# Altium PCB Safety-Rev1.PcbDoc
Units mil, origin at the board's own origin, x right, y up, seen from the top; angles counter-clockwise.
Board outline 2880 x 3030 mil, 2 copper layers (Top Layer, Bottom Layer); 107 components, 47 nets, 333 pads, 87 vias.
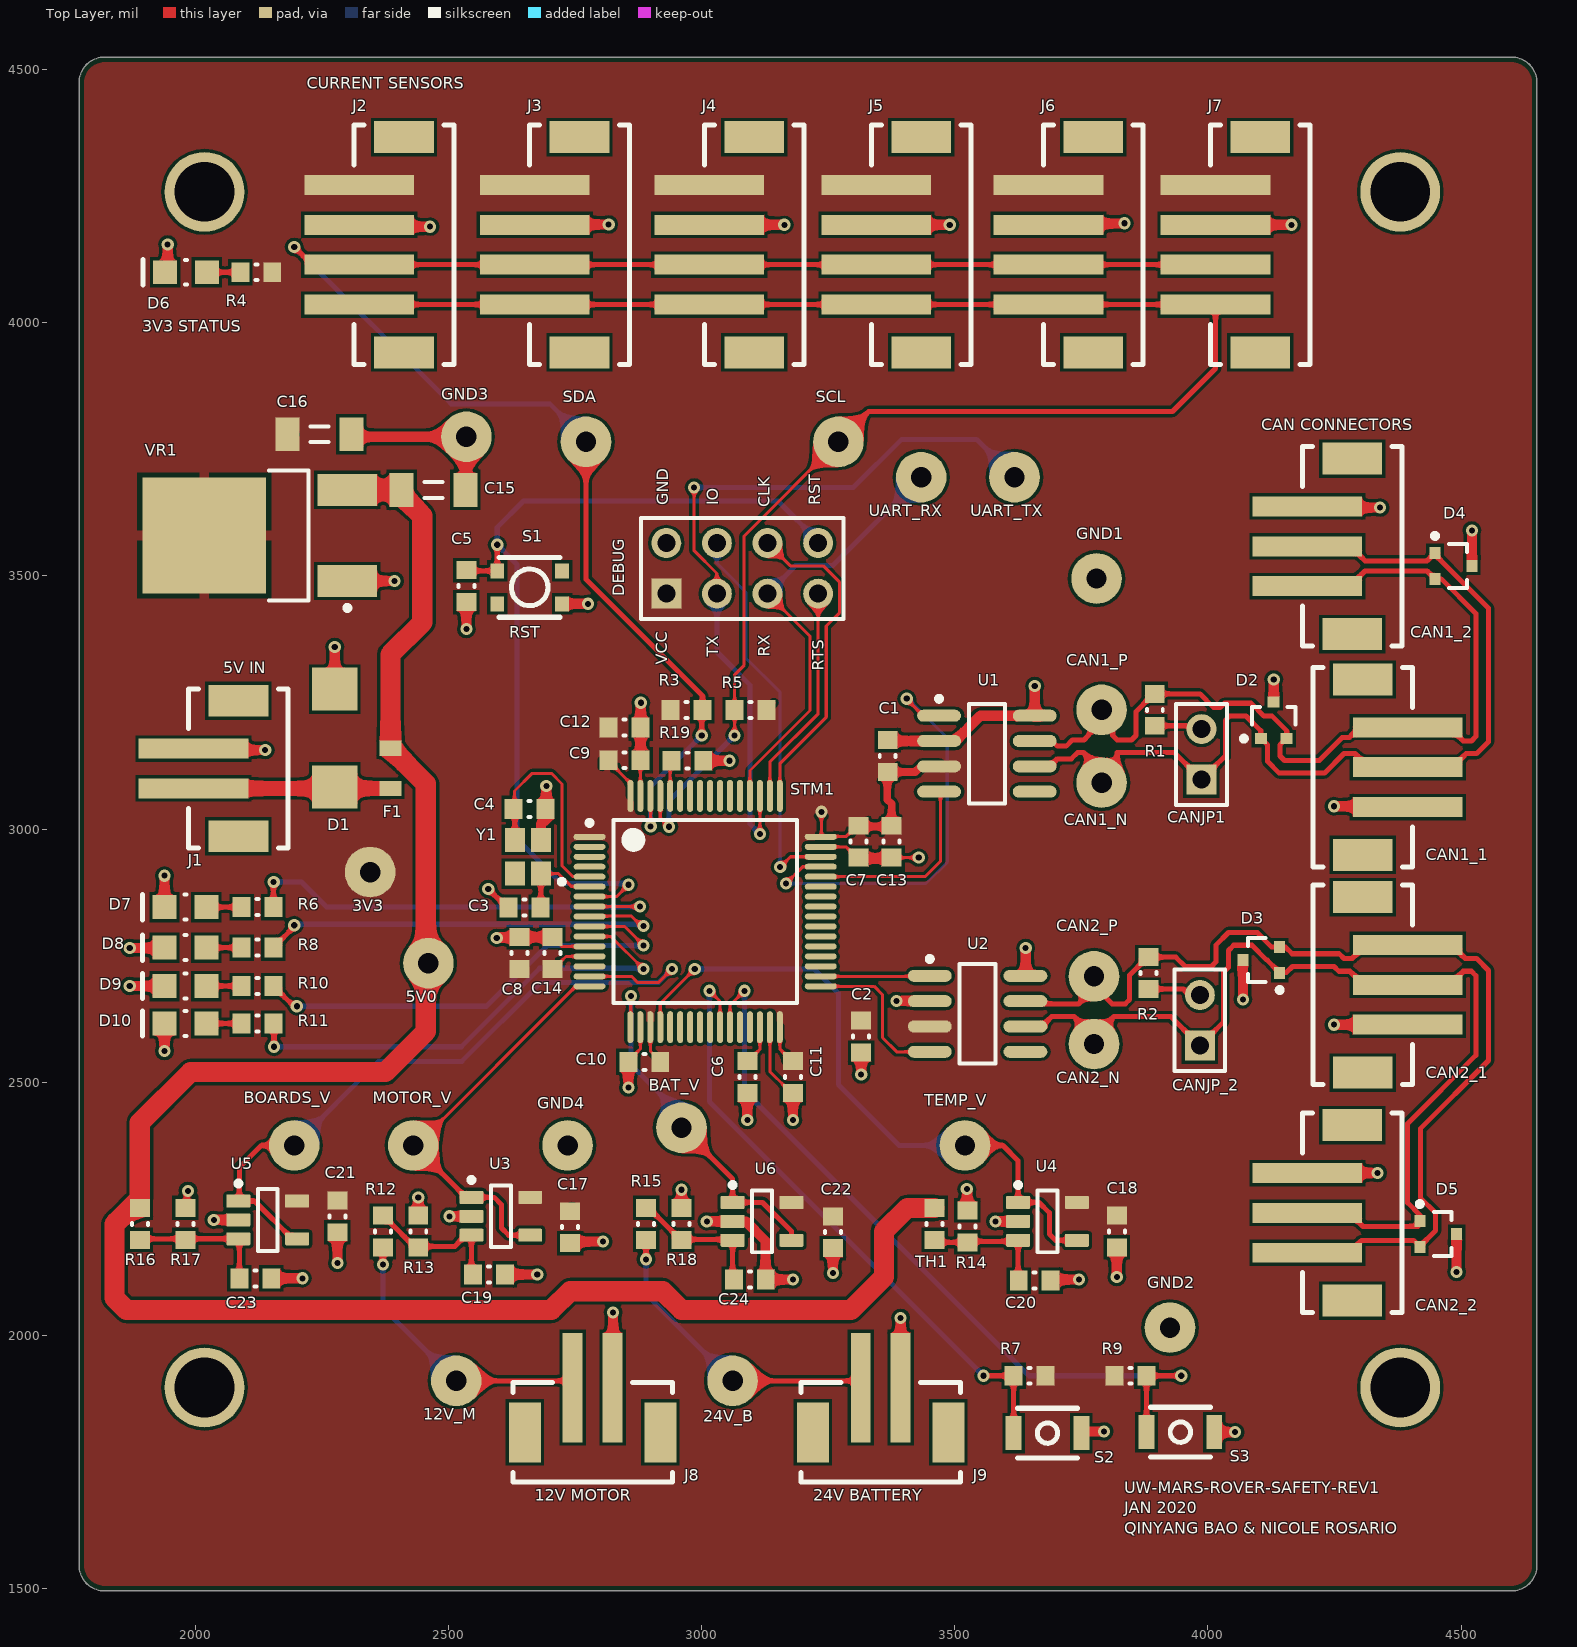
[diagram p0: Top Layer view]
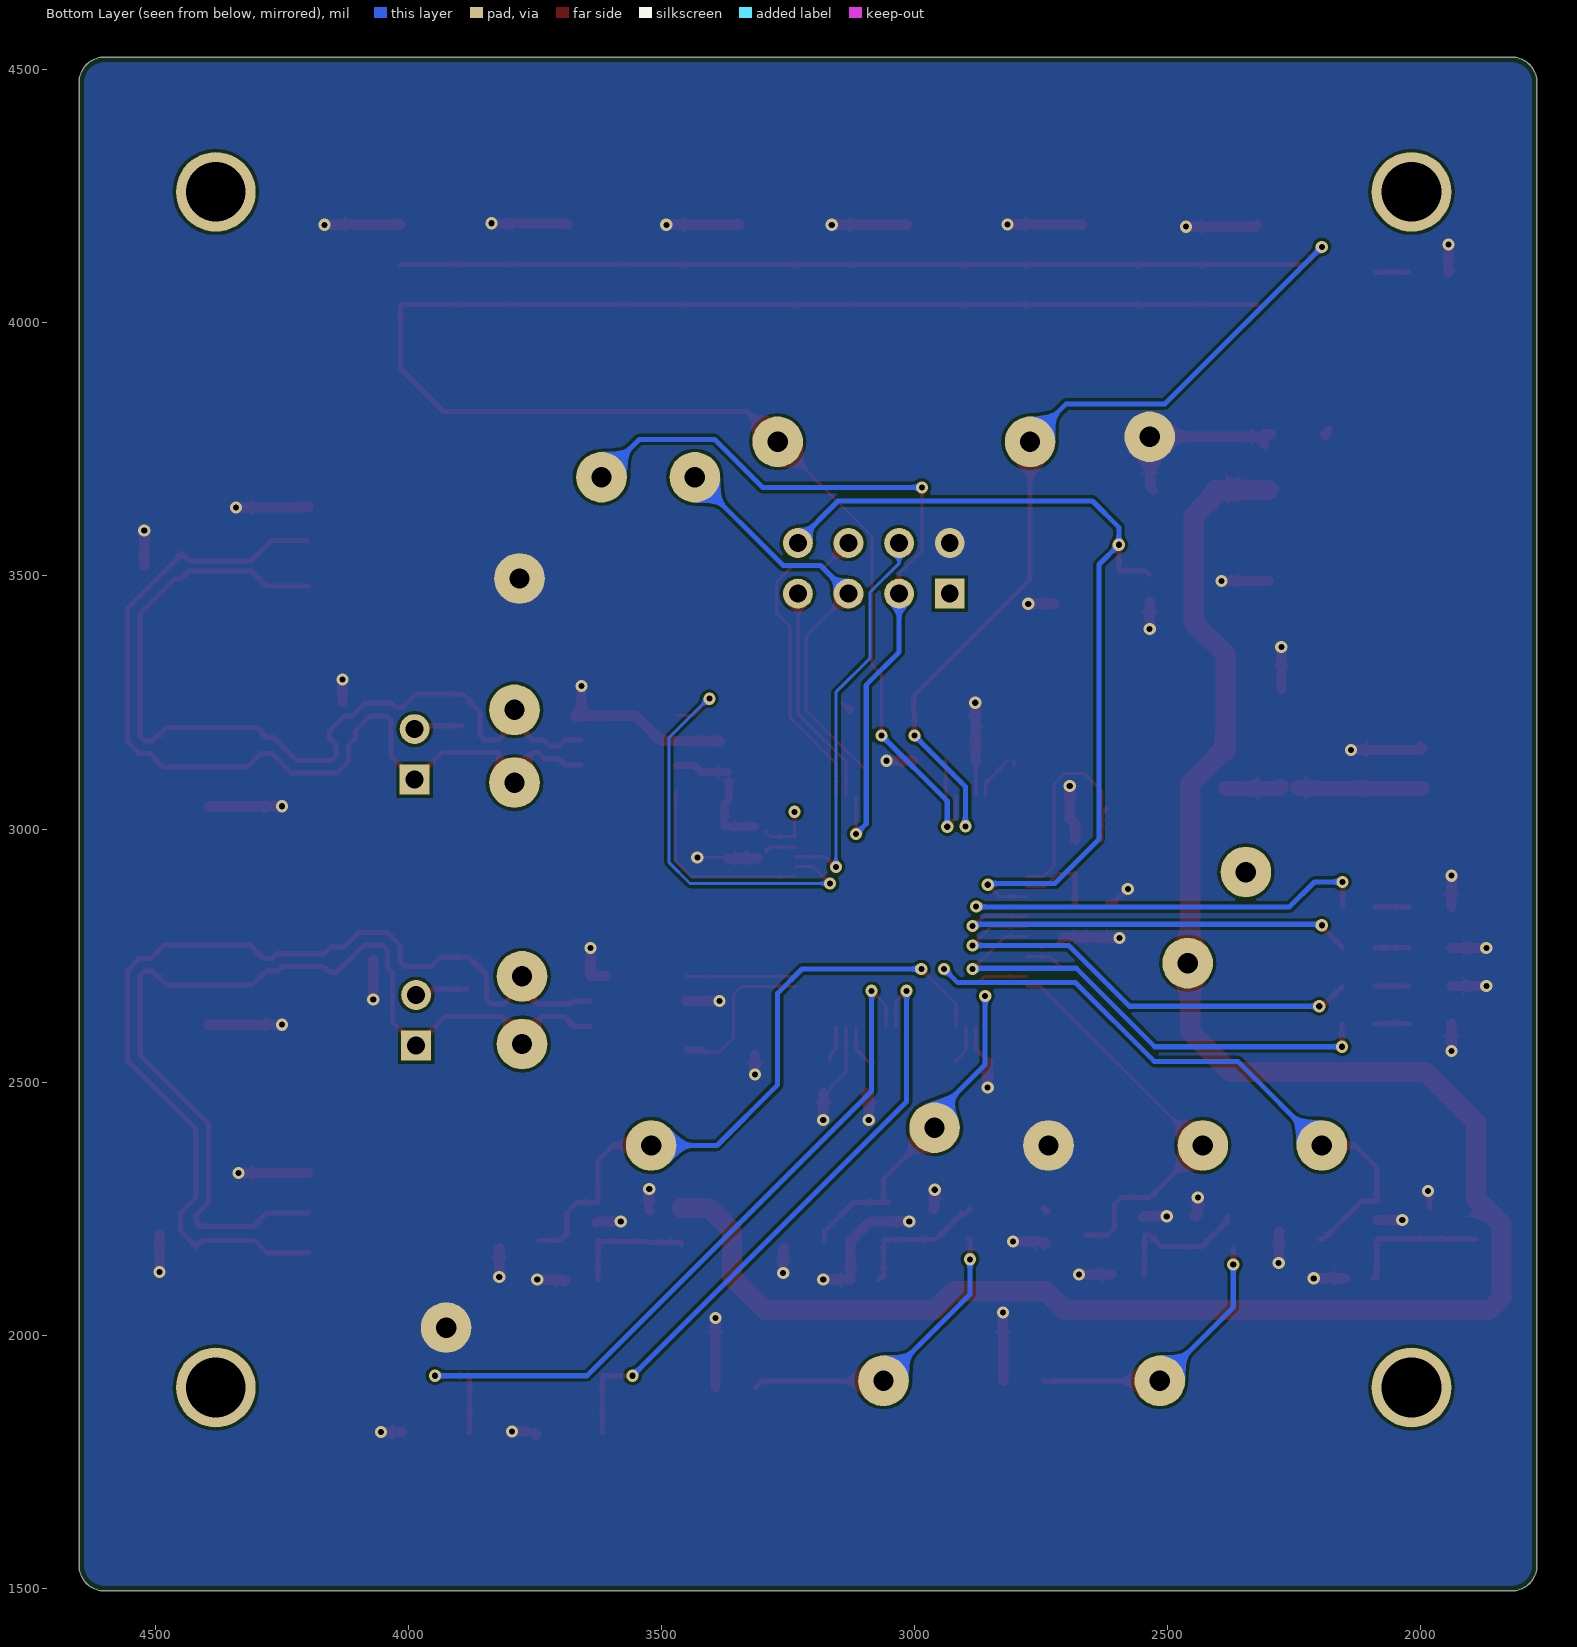
[diagram p1: Bottom Layer view, seen from below]

## Layer stack, top to bottom
Top Solder: solder mask 0.4, Solder Resist, Dk 3.5
Top Layer: signal copper 1.4
Dielectric 1: dielectric 12.6, FR-4, Dk 4.8
Bottom Layer: signal copper 1.4
Bottom Solder: solder mask 0.4, Solder Resist, Dk 3.5

## Board outline
1770,1545 1770,4475 cw(c1820,4475) 1820,4525 4600,4525 cw(c4600,4475) 4650,4475 4650,1545 cw(c4600,1545) 4600,1495 1820,1495 cw(c1820,1545)

## Design rules (kind name [scope] priority, off if disabled: settings)
BoardOutlineClearance [All] p1: gap=10 ignorepadtopadclearanceinfootprint=FALSE except(0: Arc-SplitContinuation Track-SplitContinuation SMDPad-SplitContinuation THPad-SplitContinuation Via-SplitContinuation Fill-SplitContinuation Poly-SplitContinuation Region-SplitContinuation Text-SplitContinuation)
Clearance [All] p1: gap=6 ignorepadtopadclearanceinfootprint=FALSE except(0: Arc-Hole Track-Hole SMDPad-Hole THPad-Hole Via-Hole Fill-Hole Poly-Hole Region-Hole Text-Hole)
DiffPairsRouting [All] p1: maxlimit=10 minlimit=10 mostfreqgap=10 toplayer_minwidth=6 toplayer_maxwidth=15 toplayer_prefwidth=10 bottomlayer_minwidth=6 bottomlayer_maxwidth=15 bottomlayer_prefwidth=10 maxuncoupledlength=500
HoleSize [All] p1: absolutevalues=TRUE maxlimit=120 minlimit=1 maxpercent=80.000 minpercent=20.000
MinimumSolderMaskSliver [All] p1: minsoldermaskwidth=5
PolygonConnect PolygonConnect_1 [InComponent('VR1') and InNet('+3V3')] p1: connectstyle=Relief reliefconductorwidth=20 reliefentries=4 polygonreliefangle="90 Angle" airgapwidth=10
PolygonConnect [All] p2: connectstyle=Direct reliefconductorwidth=10 reliefentries=4 polygonreliefangle="90 Angle" airgapwidth=10
RoutingVias [All] p1: holewidth=12 width=24 viastyle="Through Hole" minholewidth=12 minwidth=24 maxholewidth=28 maxwidth=50
SilkToSolderMaskClearance [IsPad] p1: minsilkscreentomaskgap=6 clearancetoexposedcopper=TRUE
SolderMaskExpansion [All] p1: expansion=4 istentingtop=FALSE
Width [All] p1: maxlimit=40 minlimit=6 preferedwidth=10 minimp=50.000000 maximp=50.000000 favimp=50.000000
26 further rules are at their usual default settings.

## Classes and differential pairs
component class Sense: BAT_V BOARDS_V C17 C18 C19 C20 C21 C22 C23 C24 GND4 MOTOR_V R12 R13 R14 R15 R16 R17 R18 TEMP_V TH1 U3 U4 U5 U6
component class Support: D7 D8 D9 D10 R6 R7 R8 R9 R10 R11 S2 S3 UART_RTS
component class Power: 3V3 3v3 5V0 C15 C16 D6 GND3 R4 VR1
component class MCU: C3 C4 C5 C6 C7 C8 C9 C10 C11 C12 C13 C14 R3 R5 R19 S1 SCL SDA STM1 UART_RX UART_TX Y1
component class Connectors: 12V_M 24V_B CAN1_1 CAN1_2 CAN2_1 CAN2_2 D1 D2 D3 D4 D5 DEBUG F1 J1 J2 J3 J4 J5 J6 J7 J8 J9
component class CAN: C1 C2 CAN1_N CAN1_P CAN2_N CAN2_P CANJP1 CANJP_2 GND1 GND2 R1 R2 U1 U2
differential pair CAN2: +CAN2_P -CAN2_N
differential pair CAN1: +CAN1_P -CAN1_N

## Components (designator, comment, footprint, x,y, rotation, side; value= is the part's Value field where it differs from the comment)
3V3 "TESTPOINT_LOOP" TESTPOINT_LOOP 2345,2915 r0 top
5V0 "TESTPOINT_LOOP" TESTPOINT_LOOP 2460,2735 r0 top
12V_M "TESTPOINT_LOOP" TESTPOINT_LOOP 2515,1910 r0 top
24V_B "TESTPOINT_LOOP" TESTPOINT_LOOP 3060.98,1910 r0 top
BAT_V "TESTPOINT_LOOP" TESTPOINT_LOOP 2960,2410 r0 top
BOARDS_V "TESTPOINT_LOOP" TESTPOINT_LOOP 2195,2375 r90 top
C1 "CAP_0.1uF_16V_0603" CAPC0603(1608)55_N 3367.43,3144.29 r270 top value=0.1uF
C2 "CAP_0.1uF_16V_0603" CAPC0603(1608)55_N 3315,2590 r90 top value=0.1uF
C3 "CAP_15pF_0603" CAPC0603(1608)55_N 2650,2845 r0 top value=15pF
C4 "CAP_15pF_0603" CAPC0603(1608)55_N 2660,3040 r180 top value=15pF
C5 "CAP_0.1uF_16V_0603" CAPC0603(1608)55_N 2535,3480 r90 top value=0.1uF
C6 "CAP_4.7uF_0603" CAPC0603(1608)55_N 3090,2510 r90 top value=4.7uF
C7 "CAP_0.1uF_16V_0603" CAPC0603(1608)55_N 3310,2975 r90 top value=0.1uF
C8 "CAP_1uF_16V_0603" CAPC0603(1608)55_N 2640,2755 r270 top value=1uF
C9 "CAP_0.1uF_16V_0603" CAPC0603(1608)55_N 2847.69,3135.91 r180 top value=0.1uF
C10 "CAP_0.1uF_16V_0603" CAPC0603(1608)55_N 2886.57,2540 r0 top value=0.1uF
C11 "CAP_0.1uF_16V_0603" CAPC0603(1608)55_N 3180,2510 r90 top value=0.1uF
C12 "CAP_4.7uF_0603" CAPC0603(1608)55_N 2847.69,3200.4 r180 top value=4.7uF
C13 "CAP_0.1uF_16V_0603" CAPC0603(1608)55_N 3375,2975 r90 top value=0.1uF
C14 "CAP_10nF_0603" CAPC0603(1608)55_N 2705,2755 r270 top value=10nF
C15 "10uF" CAPC1206(3216) 2470,3670 r0 top
C16 "10uF" CAPC1206(3216) 2245,3780 r0 top
C17 "CAP_0.1uF_16V_0603" CAPC0603(1608)55_N 2740,2213.5 r90 top value=0.1uF
C18 "CAP_0.1uF_16V_0603" CAPC0603(1608)55_N 3820,2205 r270 top value=0.1uF
C19 "CAP_0.1uF_16V_0603" CAPC0603(1608)55_N 2579.49,2120.12 r180 top value=0.1uF
C20 "CAP_0.1uF_16V_0603" CAPC0603(1608)55_N 3657.84,2108.15 r180 top value=0.1uF
C21 "CAP_0.1uF_16V_0603" CAPC0603(1608)55_N 2280.16,2234.92 r90 top value=0.1uF
C22 "CAP_0.1uF_16V_0603" CAPC0603(1608)55_N 3259.06,2203.5 r90 top value=0.1uF
C23 "CAP_0.1uF_16V_0603" CAPC0603(1608)55_N 2117.99,2112.48 r180 top value=0.1uF
C24 "CAP_0.1uF_16V_0603" CAPC0603(1608)55_N 3095,2110 r180 top value=0.1uF
CAN1_1 "CON_3M_SM4" JST-B3B-SM4-TB 4207.65,3122.24 r270 top
CAN1_2 "CON_3M_SM4" JST-B3B-SM4-TB 4383.53,3558.5 r90 top
CAN1_N "TESTPOINT_LOOP" TESTPOINT_LOOP 3790,3091.69 r0 top
CAN1_P "TESTPOINT_LOOP" TESTPOINT_LOOP 3790,3235.61 r0 top
CAN2_1 "CON_3M_SM4" JST-B3B-SM4-TB 4207.65,2692.24 r270 top
CAN2_2 "CON_3M_SM4" JST-B3B-SM4-TB 4383.53,2241.77 r90 top
CAN2_N "TESTPOINT_LOOP" TESTPOINT_LOOP 3775,2575.24 r0 top
CAN2_P "TESTPOINT_LOOP" TESTPOINT_LOOP 3775,2709.06 r0 top
CANJP1 "JUMPER_2" HDR1X2 3987.28,3097.53 r90 top (schematic designator CANJP_1)
CANJP_2 "JUMPER_2" HDR1X2 3984.21,2572.16 r90 top
D1 "TVS_DIODE_BIDIRECTIONAL" TVS_DIODE_BIDIRECTIONAL 2275,3180 r90 top
D2 "TVS_DIODE_CAN" NXP-SOT323-3 4130,3215 r90 top
D3 "TVS_DIODE_CAN" NXP-SOT323-3 4105.39,2741.16 r180 top
D4 "TVS_DIODE_CAN" NXP-SOT323-3 4485,3520 r0 top
D5 "TVS_DIODE_CAN" NXP-SOT323-3 4455,2200 r0 top
D6 "DIO_LED_G" LED_0805_LINE 1981.12,4100 r180 top
D7 "DIO_LED_Y" LED_0805_LINE 1980,2845.87 r180 top
D8 "DIO_LED_G" LED_0805_LINE 1980,2765.87 r180 top
D9 "DIO_LED_G" LED_0805_LINE 1980,2689.92 r180 top
D10 "DIO_LED_G" LED_0805_LINE 1980,2615.87 r180 top
DEBUG "HEADER 4X2" HEADER_2X4 2930,3465 r0 top
F1 "FUSE_2A_0603" FUSE_0603 2385,3120 r90 top
GND1 "TESTPOINT_LOOP" TESTPOINT_LOOP 3780,3495 r0 top
GND2 "TESTPOINT_LOOP" TESTPOINT_LOOP 3925,2015 r0 top
GND3 "TESTPOINT_LOOP" TESTPOINT_LOOP 2535,3775 r0 top
GND4 "TESTPOINT_LOOP" TESTPOINT_LOOP 2735,2375 r0 top
J1 "CON_2M_SM4" JST-B2B-SM4-TB 2183.06,3119.64 r90 top
J2 "CON_4M_SM4" JST-B4B-SM4-TB 2510.27,4154.37 r90 top
J3 "CON_4M_SM4" JST-B4B-SM4-TB 2857.01,4154.37 r90 top
J4 "CON_4M_SM4" JST-B4B-SM4-TB 3202.01,4154.37 r90 top
J5 "CON_4M_SM4" JST-B4B-SM4-TB 3532.01,4154.37 r90 top
J6 "CON_4M_SM4" JST-B4B-SM4-TB 3872.01,4154.37 r90 top
J7 "CON_4M_SM4" JST-B4B-SM4-TB 4202.01,4154.37 r90 top
J8 "CON_2M_SM4" JST-B2B-SM4-TB 2784.37,1709.64 r0 top
J9 "CON_2M_SM4" JST-B2B-SM4-TB 3353.57,1709.64 r0 top
MOTOR_V "TESTPOINT_LOOP" TESTPOINT_LOOP 2430,2375 r90 top
R1 "RES_120R_0603" RESC0603(1608)_N 3895,3235.61 r270 top value=120R
R2 "RES_120R_0603" RESC0603(1608)_N 3882.6,2715.51 r270 top value=120R
R3 "RES_4K7_0603" RESC0603(1608)_N 2970,3235 r180 top value=4K7
R4 "RES_100R_0603" RESC0603(1608)_N 2120,4100 r0 top value=100R
R5 "RES_4K7_0603" RESC0603(1608)_N 3096.5,3235 r0 top value=4K7
R6 "RES_100R_0603" RESC0603(1608)_N 2122.35,2845.87 r180 top value=100R
R7 "RES_10K_0603" RESC0603(1608)_N 3647.64,1920 r180 top value=10K
R8 "RES_100R_0603" RESC0603(1608)_N 2122.35,2765.87 r180 top value=100R
R9 "RES_10K_0603" RESC0603(1608)_N 3847.16,1920 r180 top value=10K
R10 "RES_100R_0603" RESC0603(1608)_N 2122.35,2689.92 r180 top value=100R
R11 "RES_100R_0603" RESC0603(1608)_N 2122.35,2615.87 r180 top value=100R
R12 "RES_1K_0603" RESC0603(1608)_N 2370,2205 r90 top value=1K
R13 "RES_1K_0603" RESC0603(1608)_N 2440,2205 r90 top value=1K
R14 "RES_1K_0603" RESC0603(1608)_N 3525,2215 r90 top value=1K
R15 "RES_1K_0603" RESC0603(1608)_N 2890,2220 r90 top value=1K
R16 "RES_1K_0603" RESC0603(1608)_N 1890,2220 r270 top value=1K
R17 "RES_1K_0603" RESC0603(1608)_N 1980,2220 r90 top value=1K
R18 "RES_1K_0603" RESC0603(1608)_N 2960,2220 r90 top value=1K
R19 "RES_10K_0603" RESC0603(1608)_N 2971.5,3135 r180 top value=10K
S1 "SW_PWR" PTS830GM140 2660,3477.52 r180 top
S2 "SW_TACTILE" B3U-1100P 3683.07,1806.61 r0 top
S3 "SW_TACTILE" B3U-1100P 3945.59,1808.53 r0 top
SCL "TESTPOINT_LOOP" TESTPOINT_LOOP 3270,3765 r0 top
SDA "TESTPOINT_LOOP" TESTPOINT_LOOP 2771.37,3765 r0 top
STM1 "STM32F446RET6" STM-LQFP64_L 3006.65,2837.01 r0 top
TEMP_V "TESTPOINT_LOOP" TESTPOINT_LOOP 3520,2375 r90 top (schematic designator ONBOARD_TEMP_V)
TH1 "NTC_THERM_100K" RESC0603(1608)_N 3460,2220 r270 top value=100K
U1 "IC TXRX CAN" LT-S8_N 3563.35,3148.91 r0 top
U2 "IC TXRX CAN" LT-S8_N 3545,2635 r0 top
U3 "OPA313IDBVR" DBV0005A_M 2603.07,2235 r0 top
U4 "OPA313IDBVR" DBV0005A_M 3683.07,2225 r0 top
U5 "OPA313IDBVR" DBV0005A_M 2142.6,2227.87 r0 top
U6 "OPA313IDBVR" DBV0005A_M 3119.06,2225 r0 top
UART_RX "TESTPOINT_LOOP" TESTPOINT_LOOP 3433.58,3695.06 r0 top
UART_TX "TESTPOINT_LOOP" TESTPOINT_LOOP 3617.95,3695.06 r0 top
VR1 "5V0_3V3_LDO" VOLTAGE_REGULATOR 2190,3580 r90 top
Y1 "CRYSTAL_32MHZ" AVX-CX2520DB32000D0GEJZ1-4_V 2656.55,2945.28 r180 top
? "Comment" MOUNTING_HOLE#1 4297.96,1833.65 r0 top
? "Comment" MOUNTING_HOLE#2 2037.76,2033.65 r0 top
? "Comment" MOUNTING_HOLE#3 4615.96,3903.86 r0 top
? "Comment" MOUNTING_HOLE#4 1767.76,3838.86 r0 top

## Footprints (in the part's own frame and the unit in brackets; to place one, negate y for a bottom-side part, rotate by r counter-clockwise, add the part's x,y. Pads: shape width x height; smd on the part's side, far side on the other; paste and mask are expansions set on the pad)
AVX-CX2520DB32000D0GEJZ1-4_V [mm] "Hand Drawn, 4-Leads,Body 2.5x2mm"
  rect 1x1.2 smd: 1(-0.65,0.85) 2(-0.65,-0.85) 3(0.65,-0.85) 4(0.65,0.85)
  silkscreen extent -1.83,1.13 -1.58,1.38, body extent -1,-1.25 1,1.25, height 0.55
B3U-1100P [mm] "TACTILE SWITCH GREY"
  rect 0.8x1.7 smd: 1(-1.7,0) 2(1.7,0)
  silkscreen extent -1.5,-1.25 1.5,1.25, body extent -2,-1.25 2,1.25, height 1.6
CAPC0603(1608)55_N [mm] "Chip Capacitor, Body 1.6x0.8mm, Height 0.55mm, IPC Medium Density"
  rect 0.9x1 smd: 1(-0.8,0) 2(0.8,0)
  silkscreen extent -0.05,-0.4 0.05,0.4, body extent -0.87,-0.48 0.88,0.47, height 0.55
CAPC1206(3216) [mm] "Chip Capacitor, Body 3.2x1.6mm, Height 0.55mm, IPC Medium Density"
  rect 1.2x1.7 smd: 1(-1.6,0) 2(1.6,0)
  silkscreen extent -0.45,-0.4 0.45,0.4, body extent -1.6,-0.85 1.6,0.85, height 1.75
DBV0005A_M [mm] "SOT23, 5-Leads, Body 3.05x1.75mm, Pitch 0.95mm, IPC Low Density"
  rrect15% 1.2x0.65 smd: 1(-1.475,0.95) 2(-1.475,0) 3(-1.475,-0.95) 4(1.475,-0.95) 5(1.475,0.95)
  silkscreen extent -1.6,-1.55 0.5,1.95, body extent -1.42,-1.46 1.42,1.46, height 1.08
FUSE_0603 [mm] "Chip Fuse, Body 1.6x0.81mm"
  rect 0.762x1.09 smd: 1(-1.005,0) 2(1.005,0)
  body extent -0.8,-0.38 0.8,0.38, height 0.75
HDR1X2 [mm] "Connector; Header; 2 Position"
  rect 1.5x1.5 hole 0.9: 1(0,0)
  round 1.5 hole 0.9: 2(2.54,0)
  silkscreen extent -1.27,-1.27 3.81,1.27, body extent -1.27,-1.27 3.81,1.27, height 6.35
HEADER_2X4 [mm]
  rect 1.5x1.5 hole 0.9: 1(0,0)
  round 1.5 hole 0.9: 2(2.54,0) 3(5.08,0) 4(7.62,0) 5(0,2.54) 6(2.54,2.54) 7(5.08,2.54) 8(7.62,2.54)
  silkscreen extent -1.27,-1.27 8.89,3.81, body extent -1.36,-1.32 8.8,3.67, height 8.54
JST-B2B-SM4-TB [mm]
  rect 1x5.5 smd: 1(-1,4.75) 2(1,4.75)
  rect 1.6x3 smd: 3(-3.4,2.5) 4(3.4,2.5)
  silkscreen extent -4,0 4,5, body extent -3.97,0 3.97,7, height 6.6
JST-B3B-SM4-TB [mm]
  rect 1x5.5 smd: 1(-2,4.75) 2(0,4.75) 3(2,4.75)
  rect 1.6x3 smd: 4(-4.4,2.5) 5(4.4,2.5)
  silkscreen extent -5,0 5,5, body extent -4.97,0 4.97,7, height 6.6
JST-B4B-SM4-TB [mm]
  rect 1x5.5 smd: 1(-3,4.75) 2(-1,4.75) 3(1,4.75) 4(3,4.75)
  rect 1.6x3 smd: 5(-5.4,2.5) 6(5.4,2.5)
  silkscreen extent -6,0 6,5, body extent -5.98,0 5.98,7, height 6.6
LED_0805_LINE [mm] "SMD, 2-Leads, Body 2x1.25mm"
  rect 1.2x1.2 smd: 1(-1.05,0) 2(1.05,0)
  silkscreen extent -0.05,-0.63 2.16,0.64, body extent -1,-0.63 1,0.63, height 0.8
LT-S8_N [mm] "SOP, 8-Leads, Body 4.9x3.9mm, Pitch 1.27mm, IPC Medium Density"
  oval 2.2x0.6 smd: 1(-2.4,1.905) 2(-2.4,0.635) 3(-2.4,-0.635) 4(-2.4,-1.905) 5(2.4,-1.905) 6(2.4,-0.635) 7(2.4,0.635) 8(2.4,1.905)
  silkscreen extent -2.52,-2.5 0.9,2.88, body extent -2,-2.5 2,2.5, height 1.76
MOUNTING_HOLE#1 [mm]
  round 4 hole 3 unplated: 0(2.083,1.6)
MOUNTING_HOLE#2 [mm]
  round 4 hole 3 unplated: 0(-0.508,-3.48)
MOUNTING_HOLE#3 [mm]
  round 4 hole 3 unplated: 0(-5.994,9.017)
MOUNTING_HOLE#4 [mm]
  round 4 hole 3 unplated: 0(6.35,10.668)
NXP-SOT323-3 [mm] "SOT23, 3-Leads, Body 2.2x1.35mm, Pitch 0.65mm"
  rect 0.55x0.6 smd paste-1: 1(-0.925,0.65) 2(-0.925,-0.65) 3(0.925,0)
  silkscreen extent -1.05,-1.1 0.67,1.62, body extent -1.15,-1.1 1.15,1.1, height 1.1
PTS830GM140 [mm] "PWR TACTILE SWITCH (RED)"
  rect 0.7x0.75 smd: 1(-1.625,0.825) 2(1.625,0.825) 3(-1.625,-0.825) 4(1.625,-0.825)
  silkscreen extent -1.53,-1.5 1.53,1.5, body extent -1.75,-1.3 1.75,1.3, height 1.35
RESC0603(1608)_N [mm] "Chip Resistor, Body 1.6x0.8mm, IPC Medium Density"
  rect 0.9x1 smd: 1(-0.8,0) 2(0.8,0)
  silkscreen extent -0.05,-0.4 0.05,0.4, body extent -0.85,-0.47 0.85,0.47, height 0.6
STM-LQFP64_L [mm] "QFP, 64-Leads, Body 10x10mm, Pitch 0.5mm, IPC High Density"
  oval 1.6x0.3 smd: 1(-5.8,3.75) 2(-5.8,3.25) 3(-5.8,2.75) 4(-5.8,2.25) 5(-5.8,1.75) 6(-5.8,1.25) 7(-5.8,0.75) 8(-5.8,0.25) 9(-5.8,-0.25) 10(-5.8,-0.75) 11(-5.8,-1.25) 12(-5.8,-1.75) 13(-5.8,-2.25) 14(-5.8,-2.75) 15(-5.8,-3.25) 16(-5.8,-3.75) 33(5.8,-3.75) 34(5.8,-3.25) 35(5.8,-2.75) 36(5.8,-2.25) 37(5.8,-1.75) 38(5.8,-1.25) 39(5.8,-0.75) 40(5.8,-0.25) 41(5.8,0.25) 42(5.8,0.75) 43(5.8,1.25) 44(5.8,1.75) 45(5.8,2.25) 46(5.8,2.75) 47(5.8,3.25) 48(5.8,3.75)
  oval 0.3x1.6 smd: 17(-3.75,-5.8) 18(-3.25,-5.8) 19(-2.75,-5.8) 20(-2.25,-5.8) 21(-1.75,-5.8) 22(-1.25,-5.8) 23(-0.75,-5.8) 24(-0.25,-5.8) 25(0.25,-5.8) 26(0.75,-5.8) 27(1.25,-5.8) 28(1.75,-5.8) 29(2.25,-5.8) 30(2.75,-5.8) 31(3.25,-5.8) 32(3.75,-5.8) 49(3.75,5.8) 50(3.25,5.8) 51(2.75,5.8) 52(2.25,5.8) 53(1.75,5.8) 54(1.25,5.8) 55(0.75,5.8) 56(0.25,5.8) 57(-0.25,5.8) 58(-0.75,5.8) 59(-1.25,5.8) 60(-1.75,5.8) 61(-2.25,5.8) 62(-2.75,5.8) 63(-3.25,5.8) 64(-3.75,5.8)
  silkscreen extent -5.92,-4.6 4.6,4.6, body extent -5,-5 5,5, height 1.6
TESTPOINT_LOOP [mm]
  round 2.54 hole 1.02: 1(0,0)
  body extent -1.27,-1.27 1.27,1.27, height 4.57
TVS_DIODE_BIDIRECTIONAL [mm]
  rect 2.16x2.26 smd: 1(-2.45,0) 2(2.45,0)
  body extent -2.7,-1.8 2.7,1.8, height 2.27
VOLTAGE_REGULATOR [mm] "DPAK, 3-Leads, Body 6.095x6.54mm, Pitch 4.57mm"
  rect 1.6x3 smd: 1(-2.285,-2.79) 3(2.285,-2.79)
  rect 5.8x6.2 smd: 2(0,4.39)
  silkscreen extent -3.76,-2.92 3.27,1.14, body extent -3.27,-0.84 3.27,5.25, height 2.38

## Part data
3V3 5V0 12V_M 24V_B BAT_V BOARDS_V CAN1_N CAN1_P CAN2_N CAN2_P GND1 GND2 GND3 GND4 MOTOR_V SCL SDA TEMP_V UART_RX UART_TX: "Loop testpoint through-hole pad", Manufacturer="Keystone Electronics", Manufacturer Part Number 1=5002, Supplier Part Number 1=36-5002-ND, Supplier 1=Digi-Key
C1 C2 C5 C7 C9 C10 C11 C13 C17 C18 C19 C20 C21 C22 C23 C24: "CAP CER 0.1UF 16V X7R 0603", Manufacturer=Yageo, MPN=CC0603KRX7R7BB104, Package="0603 (1608 Metric)", Supplier Part Number 1=311-1088-1-ND, Temperature Coefficient=X7R, Voltage Rating=16V, Dimensions="0.063\" L x 0.031\" W (1.60mm x 0.80mm)", Supplier 1=Digi-Key
C3 C4: "CAP CER 15PF 250V NPO 0603", Manufacturer=Yageo, MPN=AC0603JRNPOYBN150, Package="0603 (1608 Metric)", Supplier Part Number 1=311-3282-1-ND, Temperature Coefficient=NP0, Voltage Rating=250V, Dimensions="0.063\" L x 0.031\" W (1.60mm x 0.80mm)", Supplier 1=Digi-Key
C6 C12: "CAP CER 4.7UF 6.3V X5R 0603", Manufacturer=Yageo, MPN=CC0603KRX5R5BB475, Package="0603 (1608 Metric)", Supplier Part Number 1=311-1521-1-ND, Temperature Coefficient=X5R, Voltage Rating=6.3V, Dimensions="0.063\" L x 0.031\" W (1.60mm x 0.80mm)", Supplier 1=Digi-Key
C8: "CAP CER 1UF 16V Y5V 0603", Manufacturer=Yageo, MPN=CC0603ZRY5V7BB105, Package="0603 (1608 Metric)", Supplier Part Number 1=311-1372-1-ND, Temperature Coefficient=Y5V, Voltage Rating=16V, Dimensions="0.063\" L x 0.031\" W (1.60mm x 0.80mm)", Supplier 1=Digi-Key
C14: "CAP CER 10000PF 16V X7R 0603", Manufacturer=Yageo, MPN=CC0603KRX7R7BB103, Package="0603 (1608 Metric)", Supplier Part Number 1=311-3369-1-ND, Temperature Coefficient=X7R, Voltage Rating=16V, Dimensions="0.063\" L x 0.031\" W (1.60mm x 0.80mm)", Supplier 1=Digi-Key
C15 C16: library part CAP_10uF_50V_1206, "CAP CER 10UF 50V X5R 1206", Manufacturer=Murata, MPN=GRT31CR61H106KE01L, Package="1206 (3216 Metric)", Supplier Part Number 1=490-12456-1-ND, Voltage Rating=50V, Dimensions="0.126\" L x 0.063\" W (3.20mm x 1.6mm)", Supplier 1=Digi-Key
CAN1_1 CAN1_2 CAN2_1 CAN2_2: Manufacturer=JST, Manufacturer Part Number=B3B-PH-SM4-TB(LF)(SN), Max Current Rating=2A, Max Voltage Rating=100V, Supplier Part Number 1=455-1735-1-ND, ComponentLink1Description=https://datasheet.ciiva.com/11747/0900766b80ddea81-11747684.pdf?src-supplier=RSComponents, ComponentLink1URL=https://datasheet.ciiva.com/11747/0900766b80ddea81-11747684.pdf?src-supplier=RSComponents, Pitch=2mm, Supplier 1=Digi-Key
CANJP1 CANJP_2: "HEADER 2X1", Supplier Part Number 1=A26542-ND, Supplier 1=Digi-Key
D1: "TVS DIODE 5V 9.2V DO214AA", Breakdown Voltage=6.4V, Case/Package=SMB, Clamping Voltage=9.2V, Leakage Current=1.6mA, Manufacturer="Nexperia USA Inc.", Manufacturer 1=Littelfuse, Manufacturer Part Number 1=SMBJ5.0CA, Max Breakdown Voltage=7V, Max Operating Temperature=150°C, Max Power Dissipation=5W, Max Surge Current=65.3A, Min Operating Temperature=-65°C, MPN=PESD2CAN,215, Operating Supply Voltage=5V, Package="SC-70, SOT-323", Package Quantity=3000, Peak Pulse Power=600W, Power Line Protection=No, Supplier Part Number 1=1727-3891-1-ND, Test Current=10mA, ComponentLink1Description=Datasheet, ComponentLink1URL=https://www.littelfuse.com/~/media/electronics/datasheets/tvs_diodes/littelfuse_tvs_diode_smbj_datasheet.pdf.pdf, Composition=Zener, Direction=Bidirectional, Element Configuration=Single, ESD Protection=Yes, Height=0.096inch, Lead Free="Lead Free", Length=0.179inch, Max Reverse Leakage Current=1.6mA, Min Breakdown Voltage=6.4V, Mount="Surface Mount", Number of Bidirectional Channels=1, Number of Channels=1, Number of Elements=1, Number of Pins=2, Packaging="Tape and Reel", Peak Pulse Current=65.3A, Polarity=Bidirectional, Power Dissipation=600W, Pricing 1="1=0.39000, 10=0.31300, 25=0.28640, 100=0.17980, 250=0.17784, 500=0.16650, 1000=0.11322 (USD)", Radiation Hardening=No, REACH SVHC="No SVHC", Reverse Breakdown Voltage=6.4V, Reverse Standoff Voltage=5V, Stock 1=23233, Supplier 1=Digi-Key, Termination=SMD/SMT, Voltage Rating (DC)=5V, Width=0.155inch
D2 D3 D4 D5: "TVS DIODE 24V 41V SOT323-3", Manufacturer="Nexperia USA Inc.", Manufacturer Part Number=PESD2CAN,215, Package="SC-70, SOT-323", Supplier Part Number 1=1727-3891-1-ND, ComponentLink1Description=Datasheet, ComponentLink1URL=https://assets.nexperia.com/documents/data-sheet/PESD1CAN-U.pdf, Supplier 1=Digi-Key
D6 D8 D9 D10: "LED GREEN DIFFUSED 0805 SMD", Forward Voltage Drop=2.2V, Manufacturer=OSRAM, MPN="LG R971-KN-1", Package="0805 (2012 Metric)", Supplier Part Number 1=475-1410-1-ND, Supplier 1=Digi-Key
D7: "LED YELLOW DIFFUSED 0805 SMD", Forward Voltage Drop=2.2V, Manufacturer=OSRAM, MPN="LY R976-PS-36", Package="0805 (2012 Metric)", Supplier Part Number 1=475-2560-1-ND, Supplier 1=Digi-Key
DEBUG: "Header, 4-Pin Dual row", Manufacturer="Sullins Connector Solutions", MPN=GRPB042VWVN-RC, Supplier Part Number 1=S9015E-04-ND, Supplier 1=Digi-Key
F1: "FUSE SMD 2A 32V", Current Rating=2A, Supplier Part Number 1=F7132CT-ND, Voltage Rating (AC)=32V, ComponentLink1Description=https://datasheet.ciiva.com/303/467-303400.pdf?src-supplier=Digi-Key, ComponentLink1URL=https://datasheet.ciiva.com/303/467-303400.pdf?src-supplier=Digi-Key, ComponentLink2Description=http://datasheet.octopart.com/0467002.NRHF-Littelfuse-datasheet-32023482.pdf?src-supplier=Future+Electronics, ComponentLink2URL=http://datasheet.octopart.com/0467002.NRHF-Littelfuse-datasheet-32023482.pdf?src-supplier=Future+Electronics, ComponentLink3Description=http://datasheet.octopart.com/0467002.NRHF-Littelfuse-datasheet-136509808.pdf?src-supplier=Future+Electronics, ComponentLink3URL=http://datasheet.octopart.com/0467002.NRHF-Littelfuse-datasheet-136509808.pdf?src-supplier=Future+Electronics, Mount="Surface Mount", Supplier 1=Digi-Key, Supplier Packaging 1="Cut Tape", Voltage Rating (DC)=32V
J1 J8 J9: Manufacturer=JST, Manufacturer Part Number=B2B-PH-SM4-TB(LF)(SN), Max Current Rating=2A, Max Voltage Rating=100V, Supplier Part Number 1=455-1734-1-ND, ComponentLink1Description=https://datasheet.ciiva.com/11748/0900766b80ddea81-11748001.pdf?src-supplier=RSComponents, ComponentLink1URL=https://datasheet.ciiva.com/11748/0900766b80ddea81-11748001.pdf?src-supplier=RSComponents, ComponentLink2Description=https://datasheet.ciiva.com/16216/b2b-ph-sm4-tblfsn-16216102.pdf?src-supplier=Future+Electronics, ComponentLink2URL=https://datasheet.ciiva.com/16216/b2b-ph-sm4-tblfsn-16216102.pdf?src-supplier=Future+Electronics, ComponentLink3Description=https://datasheet.ciiva.com/8052/80567-8052023.pdf?src-supplier=Element14, ComponentLink3URL=https://datasheet.ciiva.com/8052/80567-8052023.pdf?src-supplier=Element14, ComponentLink4Description=https://datasheet.ciiva.com/712/eph-712504.pdf?src-supplier=Digi-Key, ComponentLink4URL=https://datasheet.ciiva.com/712/eph-712504.pdf?src-supplier=Digi-Key, ComponentLink5Description=https://datasheet.ciiva.com/712/eph-712505.pdf?src-supplier=Digi-Key, ComponentLink5URL=https://datasheet.ciiva.com/712/eph-712505.pdf?src-supplier=Digi-Key, ComponentLink6Description=https://datasheet.ciiva.com/712/eph-712506.pdf?src-supplier=Digi-Key, ComponentLink6URL=https://datasheet.ciiva.com/712/eph-712506.pdf?src-supplier=Digi-Key, Pitch=2mm, Supplier 1=Digi-Key
J2 J3 J4 J5 J6 J7: Manufacturer=JST, Manufacturer Part Number=B4B-PH-SM4-TB(LF)(SN), Max Current Rating=2A, Max Voltage Rating=100V, Supplier Part Number 1=455-1736-1-ND, ComponentLink1Description=https://datasheet.ciiva.com/8052/1699381-8052048.pdf?src-supplier=Element14, ComponentLink1URL=https://datasheet.ciiva.com/8052/1699381-8052048.pdf?src-supplier=Element14, ComponentLink2Description=https://datasheet.ciiva.com/11747/0900766b80ddea81-11747504.pdf?src-supplier=RSComponents, ComponentLink2URL=https://datasheet.ciiva.com/11747/0900766b80ddea81-11747504.pdf?src-supplier=RSComponents, ComponentLink3Description=https://datasheet.ciiva.com/6747/80567-6747409.pdf?src-supplier=Newark, ComponentLink3URL=https://datasheet.ciiva.com/6747/80567-6747409.pdf?src-supplier=Newark, ComponentLink4Description=https://datasheet.ciiva.com/727/eph-727525.pdf?src-supplier=Digi-Key, ComponentLink4URL=https://datasheet.ciiva.com/727/eph-727525.pdf?src-supplier=Digi-Key, ComponentLink5Description=https://datasheet.ciiva.com/712/eph-712582.pdf?src-supplier=Digi-Key, ComponentLink5URL=https://datasheet.ciiva.com/712/eph-712582.pdf?src-supplier=Digi-Key, ComponentLink6Description=https://datasheet.ciiva.com/712/eph-712583.pdf?src-supplier=Digi-Key, ComponentLink6URL=https://datasheet.ciiva.com/712/eph-712583.pdf?src-supplier=Digi-Key, Pitch=2mm, Supplier 1=Digi-Key
R1 R2: "RES SMD 120 OHM 5% 1/10W 0603", Manufacturer=Yageo, MPN=RC0603JR-07120RL, Package="0603 (1608 Metric)", Supplier Part Number 1=311-120GRCT-ND, Tolerance=5%, Dimensions="0.063\" L x 0.031\" W (1.60mm x 0.80mm)", Supplier 1=Digi-Key
R3 R5: "RES SMD 4.7K OHM 5% 1/10W 0603", Manufacturer=Yageo, MPN=RC0603JR-074K7L, Package="0603 (1608 Metric)", Supplier Part Number 1=311-4.7KGRCT-ND, Tolerance=5%, Dimensions="0.063\" L x 0.031\" W (1.60mm x 0.80mm)", Supplier 1=Digi-Key
R4 R6 R8 R10 R11: "RES SMD 100 OHM 1% 1/10W 0603", Manufacturer=Yageo, MPN=RC0603FR-07100RL, Package="0603 (1608 Metric)", Supplier Part Number 1=311-100HRCT-ND, Tolerance=1%, Dimensions="0.063\" L x 0.031\" W (1.60mm x 0.80mm)", Supplier 1=Digi-Key
R7 R9 R19: "RES SMD 10K OHM 5% 1/10W 0603", Manufacturer=Yageo, MPN=RC0603JR-0710KL, Package="0603 (1608 Metric)", Supplier Part Number 1=311-10KGRCT-ND, Tolerance=5%, Dimensions="0.063\" L x 0.031\" W (1.60mm x 0.80mm)", Supplier 1=Digi-Key
R12 R13 R14 R15 R16 R17 R18: "RES SMD 1K OHM 5% 1/10W 0603", Manufacturer=Yageo, MPN=RC0603JR-071KL, Package="0603 (1608 Metric)", Supplier Part Number 1=311-1.0KGRCT-ND, Tolerance=5%, Dimensions="0.063\" L x 0.031\" W (1.60mm x 0.80mm)", Supplier 1=Digi-Key
S1: "Power Switch (Red)", Manufacturer=C&K, MPN="PTS830GM140 SMTR LFS", Supplier Part Number 1=CKN10587CT-ND, ComponentLink1Description=Datasheet, ComponentLink1URL=https://www.ckswitches.com/media/1478/pts830.pdf, Supplier 1=Digi-Key
S2 S3: "Tactile Switch (Grey)", Manufacturer="Omron Electronics Inc-EMC Div", MPN=B3U-1100P, Supplier Part Number 1=SW1021CT-ND, Supplier 1=Digi-Key
STM1: library part MCU_STM32F446RET6, "ARM Cortex-M4 32-bit MCU+FPU, 512 KB Flash, 128 KB Internal RAM, 50 I/Os, 64-Pin LQFP, -40 to 85 degC, Tray", I/Os (High Current)=50, Operating Frequency(F) (Processor speed) (MHz)=180, Package Description=LQFP64, Package Reference="64-Pin Low-profile Quad Flat Package, Body 10 x 10 mm, Pitch 0.5 mm", Supply Voltage(Vcc) min (V)=1.7, ComponentLink1Description="Manufacturer URL", ComponentLink1URL=http://www.st.com/, ComponentLink2Description=Datasheet, ComponentLink2URL=http://www.st.com/st-web-ui/static/active/en/resource/technical/document/datasheet/DM00141306.pdf, Core="ARM Cortex-M4", D/A Converter=2, DatasheetVersion="Rev. 6", FLASH Size (Prog) (kB)=512, Internal RAM Size (kB)=128, Mounting Technology="Surface Mount", Packing=Tray
TH1: "THERM NTC 100KOHM 4700K 0603", Manufacturer=Panasonic, MPN=ERT-J1VV104J, Supplier Part Number 1=P10555CT-ND, Supplier 1=Digi-Key
U1 U2: library part LTC2875, "IC TXRX CAN 4MBPS 8SO", Manufacturer="Linear Technologies", MPN=LTC2875IS8#PBF, Package="8-SOIC (0.154\", 3.90mm Width)", Supplier Part Number 1=LTC2875IS8#PBF-ND, ComponentLink1Description=Datasheet, ComponentLink1URL=https://www.analog.com/media/en/technical-documentation/data-sheets/2875f.pdf, Supplier 1=Digi-Key
U3 U4 U5 U6: library part OPAMP, "IC OPAMP GP 1 CIRCUIT SOT23-5", Manufacturer="Texas Instruments", Rating=Catalog, Supplier Part Number 1=296-35607-1-ND, Total Supply Voltage(Max)(+5V is 5, +/-5V is 10)=5.5, Total Supply Voltage(Min)(+5V is 5, +/-5V is 10)=1.8, CMRR(Min)(dB)=70, Code_JEDEC=MO-178, ComponentLink1Description="Manufacturer URL", ComponentLink1URL=http://www.ti.com/, ComponentLink2Description=Datasheet, ComponentLink2URL=http://www.ti.com/lit/ds/symlink/opa313.pdf, ComponentLink3Description="Package Specification", ComponentLink3URL=http://www.ti.com/litv/pdf/mpds018i, DatasheetVersion=SBOS649C, Eco-Plan="Green (RoHS & no Sb/Br)", GBW(Typ)(MHz)=1, Iq per channel(Max)(mA)=0.06, Mounting Technology="Surface Mount", Number of Channels=1, Offset Drift(Typ)(uV/C)=2, PackageDescription="5-Pin Plastic Small Outline, Body 1.6 x 2.9 mm, Pitch 0.95 mm", PackageReference=DBV0005A, PackageVersion="4073253-4/K, 03/2006", Packing="LARGE T&R", PartNumber=OPA313IDBVR, Slew Rate(Typ)(V/us)=0.5, SubFamily="Low Input Bias Current Amp (<=10pA), Low Power Amp (<=500uA)", Supplier 1=Digi-Key, Vio (25C)(Max)(mV)=2.5
VR1: "IC REG LINEAR 3.3V 1A DPAK", Current Output=1A, Manufacturer="ON Semiconductor", MPN=NCP1117DT33T5G, Supplier Part Number 1=NCP1117DT33T5GOSCT-ND, Supplier 1=Digi-Key
Y1: "CRYSTAL 32MHZ 8PF SMD", Manufacturer="Kyocera International Inc. Electronic Components", MPN=CX2520DB32000D0GPSC1, Package="4-SMD, No Lead", Supplier Part Number 1=1253-1730-1-ND, ComponentLink1Description=Datasheet, ComponentLink1URL=https://media.digikey.com/pdf/Data%20Sheets/AVX%20PDFs/CX2520DB_USY1M-H1-16428-00_Spec.pdf, Dimensions="0.098\" L x 0.079\" W (2.50mm x 2.00mm)", Supplier 1=Digi-Key

## Via types
v1: diameter 24, hole 12, Top Layer to Bottom Layer, tented both sides, 87 vias

## Nets (pads, with @x,y where several pads share a name; then routed paths per layer and width w, separated by ;. In a path a pad name is that pad's centre, name@x,y a point inside that pad or via, vN(x,y) a via of type N, cw(c..) or ccw(c..) an arc to the next point about the centre after c; other vN are vias at no path point)
+3V3: 3V3.1 C1.2 C2.2 C7.2 C8.2 C9.2 C10.2 C11.2 C12.2 C13.2 C14.2 C16.1 C17.2 C18.1 C21.2 C22.2 DEBUG.1 J2.4 J3.4 J4.4 J5.4 J6.4 J7.4 R3.2 R4.2 R5.2 R7.1 R9.2 STM1.1 STM1.13 STM1.19 STM1.32 STM1.48 STM1.64 U1.3 U2.3 U3.5 U4.5 U5.5 U6.5 VR1.2 | length 756.4
  Top Layer w6: C14.2 2706.97,2723.5 2731.89,2748.43 STM1.13 ; C9.2@2803.31,3123.31 C9.2@2803.31,3135 ; C9.2 2816.2,3133.94 2859.02,3091.12 STM1.64 ; STM1.19 2898.39,2561.65 2918.07,2541.97 C10.2 ; R5.2 R5.2@3142.71,3249.72 ; STM1.32 3154.29,2565.71 3166.5,2553.5 C11.2@3166.5,2541.5 ; STM1.48 STM1.48@3236.11,2985.76 ; v1(3236.41,3034.09) 3236.41,2986.06 STM1.48@3236.11,2985.76 ; C7.2@3295,2995 3285.76,2985.76 STM1.48@3236.11,2985.76
  Top Layer w15: C16.1 C16.1@2182.01,3789.84 ; C16.1@2186.93,3775.08 C16.1@2191.85,3780 ; C17.2 2738.03,2245 C17.2@2743.16,2250.13 ; R5.2 R5.2@3127.99,3236.97 ; C7.2@3314.53,3005 3375,3005 C13.2 3375,3050 3366.76,3058.24 C1.2@3366.76,3096.25 ; C1.2 3421.48,3112.79 3435.03,3126.34 U1.3@3468.86,3126.34
+5V0: 5V0.1 C15.1 F1.2 R16.1 TH1.1 VR1.3 | length 4052.6
  Top Layer w40: VR1.3@2299.86,3669.98 C15.1 2407.01,3660.16 2448,3619.16 2448,3408 2385,3345 F1.2 2455,3089.57 2455,2600 2375,2520 1990,2520 1890,2420 1890,2270 1879.76,2259.76 1840,2220 1840,2073.43 1863.43,2050 2703,2050 2740,2087 2923,2087 2960,2050 3295,2050 3360,2115 3360,2205 3406.5,2251.5 TH1.1
CAN1_N: CAN1_1.2 CAN1_2.2 CAN1_N.1 CANJP1.1 D2.1 D4.1 U1.6 | length 1904.6
  Top Layer w10: U1.6@3657.84,3126.34 3689.93,3126.34 3702.43,3138.84 3730.26,3138.84 3742.57,3151.15 3753.85,3151.15 3775,3130 3775,3106.69 CAN1_N.1 3806.69,3091.69 3820.65,3105.65 3820.65,3151.15 3933.66,3151.15 3964.8,3120 4009.75,3120 4034.3,3144.56 4034.3,3214.72 4043.09,3223.51 4075.17,3223.51 4104.41,3194.27 D2.1 4105.39,3178.58 4117.5,3166.48 4117.5,3133.93 4140.93,3110.5 4230.28,3110.5 4268.89,3149.11 4290.89,3149.11 4317.76,3122.24 CAN1_1.2 4483.24,3122.24 4510.11,3149.11 4530.85,3149.11 4554.28,3172.55 4554.28,3436.29 4448.58,3541.99 D4.1 4432.99,3530 4310,3530 4270,3570 CAN1_2.2@4200,3570
CAN1_P: CAN1_1.1 CAN1_2.1 CAN1_P.1 D2.2 D4.2 R1.1 U1.7 | length 1807.1
  Top Layer w10: U1.7@3657.84,3176.34 3689.93,3176.34 3702.43,3163.84 3719.91,3163.84 3732.22,3176.15 3755,3176.15 3763.78,3184.93 3763.78,3186.39 3770,3192.61 3770,3215.61 CAN1_P.1 3799.39,3235.61 3811.86,3223.14 3811.86,3184.93 3820.65,3176.15 3849.03,3176.15 3857.81,3184.93 3857.81,3231.89 3893.03,3267.1 R1.1 3984.21,3267.1 4011.56,3239.75 4023.98,3239.75 4032.73,3248.51 4085.52,3248.51 4110.94,3223.09 4126.91,3223.09 4155.59,3194.41 D2.2 ; D2.2@4154.61,3178.58 4142.5,3166.48 4142.5,3144.29 4151.29,3135.5 4219.92,3135.5 4265.19,3180.77 4279.21,3180.77 4299.42,3200.98 CAN1_1.1 4477.35,3200.98 4504.22,3174.11 4520.49,3174.11 4529.28,3182.9 4529.28,3425.94 4460.81,3494.41 D4.2 4432.99,3510 4310,3510 4279.76,3479.76 CAN1_2.1
CAN2_N: CAN2_1.2 CAN2_2.2 CAN2_N.1 CANJP_2.1 D3.1 D5.1 U2.6 | length 1999.9
  Top Layer w10: U2.6 3671.58,2610 3691.23,2629.65 3735.35,2629.65 3750,2615 3750,2590 3764.76,2575.24 CAN2_N.1 3790,2590.24 3790,2605 3814.65,2629.65 3926.72,2629.65 CANJP_2.1 4031.24,2619.19 4031.24,2717.45 4040.65,2726.87 4040.65,2760.22 4050.9,2770.47 4087.05,2770.47 4116.43,2741.1 4117.27,2741.1 D3.1@4141.81,2716.55 ; D3.1 D3.1@4141.81,2716.55 ; CAN2_2.2 4279.21,2241.77 4306.08,2214.9 4415.26,2214.9 4415.26,2221.28 4418.58,2224.61 D5.1 4418.58,2237.62 4394.66,2261.54 4394.66,2418.34 4529.28,2552.96 4529.28,2710.33 4520.49,2719.11 4504.22,2719.11 4477.35,2692.24 CAN2_1.2 4307.76,2692.24 4280.89,2719.11 4258.53,2719.11 4248.99,2728.66 4167.11,2728.66 4155,2716.55 D3.1@4141.81,2716.55
CAN2_P: CAN2_1.1 CAN2_2.1 CAN2_P.1 D3.2 D5.2 R2.1 U2.7 | length 2036.2
  Top Layer w10: U2.7 3671.58,2660 3676.93,2654.65 3744.65,2654.65 3760,2670 3760,2694.06 CAN2_P.1 3790.94,2709.06 3800,2700 3800,2665.34 3810.7,2654.65 3836.62,2654.65 3845.41,2663.43 3845.41,2711.79 3880.63,2747.01 R2.1 3936.43,2747.01 3955,2728.44 4006.86,2728.44 4015.65,2737.22 4015.65,2770.58 4040.55,2795.47 4097.41,2795.47 4126.13,2766.75 D3.2 4153.25,2766.75 4166.34,2753.66 4259.34,2753.66 4268.89,2744.11 4285.1,2744.11 4311.97,2770.98 CAN2_1.1 4481.27,2770.98 4508.14,2744.11 4530.85,2744.11 4554.28,2720.68 4554.28,2542.6 4419.66,2407.98 4419.66,2271.9 4450,2241.56 4450,2206.81 D5.2@4418.58,2175.39 ; CAN2_2.1 4279.21,2163.03 4303.78,2187.6 4406.38,2187.6 D5.2@4418.58,2175.39 ; D5.2 D5.2@4418.58,2175.39
GND: C1.1 C2.1 C3.1 C4.1 C5.1 C6.1 C7.1 C8.1 C9.1 C10.1 C11.1 C12.1 C13.1 C14.1 C15.2 C16.2 C17.1 C18.2 C19.1 C20.1 C21.1 C22.1 C23.1 C24.1 CAN1_1.3 CAN1_2.3 CAN2_1.3 CAN2_2.3 D1.2 D2.3 D3.3 D4.3 D5.3 D6.2 D7.2 D8.2 D9.2 D10.2 DEBUG.5 GND1.1 GND2.1 GND3.1 GND4.1 J1.2 J2.3 J3.3 J4.3 J5.3 J6.3 J7.3 J8.2 J9.2 R13.2 R14.2 R17.2 R18.2 R19.1 S1.1 S2.2 S3.2 STM1.12 STM1.18 STM1.31 STM1.47 STM1.63 U1.2 U1.8 U2.2 U2.8 U3.2 U4.2 U5.2 U6.2 VR1.1 Y1.2 | length 6020.3
  Top Layer w6: C14.1 2723.11,2768.38 2778.04,2768.38 STM1.12 ; C10.1 2855.08,2541.97 2878.7,2565.59 STM1.18 ; C12.1@2866.31,3199.49 C12.1@2866.31,3201.46 ; C9.1@2872.3,3129.01 2878.7,3122.61 STM1.63 ; C6.1 C6.1@3091.97,2478.5 ; STM1.31 STM1.31@3134.61,2587.99 ; STM1.31@3135.39,2588.77 STM1.31@3134.61,2587.99 ; C11.1@3175,2478.5 3173.03,2478.5 3165.37,2486.16 3165.37,2490.37 3134.61,2521.14 STM1.31@3134.61,2587.99 ; STM1.47 3285.04,2964.96 C7.1@3295,2955 ; C13.1 v1(3428.75,2943.5)
  Top Layer w10: R17.2@1980,2249.53 1982.35,2251.88 1982.35,2282.35 v1(1985,2285) ; v1(2578.25,2881.75) 2605,2855 C3.1@2618.5,2855 ; C2.1@3315,2553.5 C2.1@3320,2558.5
  Top Layer w20: v1@1870,2689.92 D9.2 ; v1(1870,2765) 1937.8,2765 D8.2 ; v1(1938.66,2561.65) D10.2 ; D7.2 v1(1938.66,2907.87) ; D6.2@1940.77,4102.9 1943.66,4100 1945,4101.34 v1(1945,4155) ; J1.2@2000,3162.97 J1.2 1999.16,3155.91 v1(2137.62,3155.91) ; v1(2036.06,2227.87) U5.2 ; C23.1 v1(2210.98,2112.48) ; D1.2 v1(2275,3360) ; C21.1@2278.19,2203.43 C21.1 v1(2280.16,2142.48) ; C16.2@2295,3780.16 2295.16,3780 C16.2 ; VR1.1 v1(2393,3490.04) ; C16.2@2307.99,3760 2322.99,3775 2534,3775 GND3.1@2534,3764 ; J2.3 2327,4190 v1(2463.47,4190) ; v1(2440,2272.01) 2440,2239.61 R13.2@2445,2234.61 ; v1(2501.35,2235) U3.2 U3.2@2547.8,2232.2 ; C15.2@2527.99,3670 2534,3676 GND3.1@2534,3764 ; v1(2535,3395) C5.1 ; GND3.1@2535,3765 GND3.1@2534,3764 ; v1(2595,2785) 2595.75,2785.75 2637.76,2785.75 2639.25,2787.24 C8.1 ; C19.1 C19.1 2674.94,2120.06 v1(2675,2120) ; C8.1@2638.5,2785 C8.1 ; J3.3 2669.37,4194.37 v1(2816.2,4194.37) ; Y1.2 2682.14,3010 2692.95,3020.81 v1(2692.95,3085) ; C14.1 C8.1 ; S1.1 2725,3444.02 2725.98,3445 v1(2775,3445) ; C17.1@2742.6,2179.41 C17.1 2742.99,2185 v1(2805,2185) ; J8.2@2823.74,1998.59 2823.74,1910 2825,1911.26 v1(2825,2045) ; v1(2855.08,2489.09) C10.1 ; C9.1 C12.1 2879.39,3200.6 2879.39,3249.39 v1(2879.6,3249.6) ; v1@2959.48,2287.74 2960,2287.22 2960,2249.53 R18.2@2963.94,2249.53 ; R19.1 v1(3055,3135) ; v1(3010,2225) U6.2 3087.16,2225 3125.9,2186.26 3125.9,2110.59 C24.1 v1(3180,2110) ; J4.3 v1(3163.11,4193.74) ; v1(3090,2425) C6.1 ; C6.1@3093.03,2477.52 C6.1@3095,2477.52 ; v1(3180,2425) C11.1 ; C22.1@3257.09,2172.01 C22.1 v1(3259.06,2122.83) ; C7.1@3309.37,2943.16 3310,2942.01 C13.1@3366.76,2942.01 ; v1(3315,2515) C2.1@3315,2553.5 ; J5.3 3348.13,4196.87 3351.26,4193.74 v1(3490,4193.74) ; C1.1@3383.86,3173.91 U1.2 3500.35,3173.91 3550.35,3223.91 U1.8 ; v1(3384.57,2660.51) U2.2@3451.42,2660.51 ; J9.2 v1(3392.94,2034.2) ; R14.2@3523.17,2246.36 3524.31,2247.51 3524.31,2287.94 v1(3523.63,2288.63) ; v1(3580,2225) U4.2 U4.2@3627.8,2222.2 ; U2.8@3607.99,2710 U2.8 ; v1(3640,2765) 3640,2715.91 U2.8@3640.39,2715.51 ; v1(3657.84,3282.57) U1.8 ; J6.3 3687.36,4196.1 3834.23,4196.1 v1(3835,4196.87) ; C20.1 3692.48,2105 3697.48,2110 v1(3745,2110) ; S2.2@3746.54,1803.15 S2.2 ; 3766.61,1810 v1(3795,1810) ; C18.2@3818.17,2170.8 3819.37,2172.01 3821.38,2170 3820,2168.62 v1(3820,2115) ; S3.2 v1(4053.66,1808.53) ; J7.3 4018.13,4196.87 4021.26,4193.74 v1(4165,4193.74) ; v1(4068.98,2663.43) D3.3 ; D2.3 4130.07,3251.48 4130,3251.55 v1(4130,3295.47) ; CAN2_2.3 v1(4335,2320.54) ; CAN1_2.3@4222.99,3637.24 CAN1_2.3 4198.77,3635 v1(4340,3635) ; v1(4248.99,2613.5) CAN2_1.3 ; v1(4248.99,3045) 4393.16,3045 CAN1_1.3 ; v1(4491.42,2125) D5.3 ; D4.3 v1(4521.42,3590) ; U1.8 3657.84,3221.72 3668.03,3221.72 3670.22,3223.91 U1.8
  other v1: 2959.74,2287.48 1870,2690
Net12V_M_1: 12V_M.1 J8.1 R12.1 | length 550.1
  Top Layer w10: v1(2370,2140) R12.1@2370,2170 ; 12V_M.1 J8.1@2745,1910
  Bottom Layer w10: v1(2370,2140) 2370,2055 2405,2020 12V_M.1
Net24V_B_1: 24V_B.1 J9.1 R15.1 | length 627.2
  Top Layer w10: v1(2890,2150) 2890,2190.47 R15.1@2893.94,2190.47 ; 24V_B.1@3047.76,1910 24V_B.1 3300.86,1910 J9.1
  Bottom Layer w10: v1(2890,2150) 2890,2080.98 24V_B.1
NetBAT_V_1: BAT_V.1 STM1.17 U6.1 U6.4 | length 756.7
  Top Layer w6: STM1.17 2857.68,2610 2859.8,2612.12 2859.8,2669.8 v1(2860,2670)
  Top Layer w10: BAT_V.1 3060.98,2309.02 U6.1 ; U6.1@3050.16,2262.4 U6.1 ; U6.4 3177.13,2205.39 3120.12,2262.4 U6.1
  Bottom Layer w10: v1(2860,2670) 2860,2534.69 2959.17,2435.51 BAT_V.1@2959.17,2375
NetBOARDS_V_1: BOARDS_V.1 STM1.15 U5.1 U5.4 | length 1410.8
  Top Layer w6: STM1.15 2861.06,2709.06 2873.62,2696.5 2914.12,2696.5 v1(2941.12,2723.5)
  Top Layer w10: BOARDS_V.1 2129.96,2375 2086.5,2331.54 2086.5,2267.24 U5.1 2116.42,2265.28 2191.22,2190.47 U5.4
  Bottom Layer w10: BOARDS_V.1 2361.11,2541.11 2526.11,2541.11 2682,2697 2871.18,2697 2871.68,2696.5 2914.12,2696.5 v1(2941.12,2723.5)
NetC3_2: C3.2 STM1.6 Y1.1 | length 170.4
  Top Layer w6: Y1.1 2717.13,2911.81 2741.94,2887 2777.53,2887 STM1.6
  Top Layer w10: Y1.1 2682.14,2854.35 C3.2@2686.5,2850
NetC4_2: C4.2 STM1.5 Y1.3 | length 443.3
  Top Layer w6: C4.2 2630,3041.5 2630,3075 2665,3110 2703.31,3110 2724.1,3089.21 2724.1,2927.47 2744.89,2906.69 2777.53,2906.69 STM1.5
  Top Layer w10: C4.2@2620.55,3040 2630.96,3029.59 Y1.3
NetC5_2: C5.2 DEBUG.8 S1.4 STM1.7 | length 1778.8
  Top Layer w6: STM1.7 2831.54,2866.54 v1(2855,2890)
  Top Layer w10: C5.2@2535,3502.11 C5.2@2542.89,3510 ; C5.2@2547.89,3510 S1.4 v1(2596.02,3561.65)
  Bottom Layer w10: v1(2855,2890) 2852.6,2892.4 2722.6,2892.4 2635,2980 2635,3522.68 v1(2596.02,3561.65) 2596.02,3596.02 2648,3648 3150.59,3648 3230,3568.59 DEBUG.8
NetC6_2: C6.2 STM1.30 | length 90.1
  Top Layer w6: C6.2@3080,2540 3090,2540 3114.92,2564.92 STM1.30 STM1.30@3114.14,2607.88
NetC19_2: C19.2 R12.2 R13.1 U3.3 | length 282.5
  Top Layer w10: R12.2@2382.03,2234.53 2382.03,2225.18 2431.73,2175.47 2440,2175.47 2512.05,2175.47 2534.17,2197.6 U3.3 2545,2120.12 C19.2
NetC20_2: C20.2 R14.1 TH1.2 U4.3 | length 249.9
  Top Layer w10: TH1.2@3460,2178.5 TH1.2@3462.87,2181.38 ; TH1.2@3460,2183.5 R14.1 ; R14.1@3525,2185.47 3622.87,2185.47 U4.3 3625,2109.49 C20.2
NetC23_2: C23.2 R16.2 R17.1 U5.3 | length 351.6
  Top Layer w10: R16.2@1890,2190.47 U5.3 ; 2010,2190.94 2013.94,2190.94 2014.17,2190.71 2084.29,2190.71 U5.3 ; C23.2 2086.5,2188.5 U5.3 ; C23.2@2092.52,2114.96 C23.2@2095,2112.48
NetC24_2: C24.2 R15.2 R18.1 U6.3 | length 276.2
  Top Layer w10: R15.2@2890,2249.53 2898.78,2240.75 2905.79,2240.75 2956.06,2190.47 2960,2190.47 2961.2,2189.27 3059.31,2189.27 U6.3 C24.2@3060.98,2114.68 ; C24.2@3065.98,2114.68 C24.2@3070.67,2110
NetCANJP_1_2: CANJP1.2 R1.2 | length 104.3
  Top Layer w10: R1.2 3956.83,3204.11 3970,3190.95 CANJP1.2@3993.86,3190.95
NetCANJP_2_2: CANJP_2.2 R2.2 | length 112
  Top Layer w10: R2.2 3951.5,2684.02 3970,2665.51 3977.56,2665.51 CANJP_2.2
NetD1_1: D1.1 F1.1 J1.1 | length 358.6
  Top Layer w30: J1.1 2240.59,3080.28 D1.1@2242.56,3082.24 ; D1.1 2278.11,3080.43 F1.1
NetD6_1: D6.1 R4.1 | length 66
  Top Layer w10: D6.1 R4.1
NetD7_1: D7.1 R6.2 | length 69.5
  Top Layer w10: D7.1 R6.2
NetD8_1: D8.1 R8.2 | length 69.5
  Top Layer w10: D8.1 R8.2
NetD9_1: D9.1 R10.2 | length 69.5
  Top Layer w10: D9.1 R10.2
NetD10_1: D10.1 R11.2 | length 69.5
  Top Layer w10: D10.1 R11.2
NetDEBUG_2: DEBUG.2 STM1.51 UART_TX.1 | length 1517.1
  Top Layer w6: v1(2985,3675) 2985,3549.86 3030,3504.86 DEBUG.2 ; STM1.51 3115,3065.28 v1(3115,2990.25)
  Bottom Layer w10: v1(2985,3675) 3300,3675 3395,3770 3543.02,3770 UART_TX.1 ; DEBUG.2 3030,3350 3095,3285 3095,3010.25 v1(3115,2990.25)
NetDEBUG_3: DEBUG.3 STM1.52 UART_RX.1 | length 882.5
  Top Layer w6: STM1.52 3095.24,3115.54 3214,3234.31 3214,3381 DEBUG.3
  Bottom Layer w10: DEBUG.3 3185.47,3520.47 3258.99,3520.47 UART_RX.1
NetDEBUG_4: DEBUG.4 STM1.50 | length 439.2
  Top Layer w6: STM1.50 3134.61,3132.28 3230,3227.68 DEBUG.4
NetDEBUG_6: DEBUG.6 STM1.46 | length 780.6
  Top Layer w6: v1(3155,2925) 3175.28,2945.28 STM1.46 STM1.46@3234.72,2945
  Bottom Layer w6: DEBUG.6 3030,3525.14 3087.47,3467.67 3087.47,3337.53 3155,3270 v1(3155,2925)
NetDEBUG_7: DEBUG.7 STM1.49 | length 645.7
  Top Layer w6: DEBUG.7 3175,3520 3240,3520 3272.53,3487.47 3272.53,3427.53 3246,3401 3246,3221.05 3225,3200.05 3225,3200 3154.29,3129.29 STM1.49
NetJ2_1: J2.1 J3.1 J4.1 J5.1 J6.1 J7.1 R5.1 SCL.1 STM1.61 | length 3590.5
  Top Layer w6: STM1.61 2918.07,3022.39 2935,3005.47 v1(2935,3004.5) ; v1(3065,3185) R5.1 3065,3305 3083.76,3323.76 3083.76,3578.91 3269.86,3765 SCL.1
  Top Layer w10: J2.1 J3.1 J4.1 J5.1 J6.1 J7.1 4015,3910 3930,3825 3330,3825 SCL.1
  Bottom Layer w10: v1(2935,3004.5) 2935,3055.36 3064.64,3185 v1(3065,3185)
NetJ2_2: J2.2 J3.2 J4.2 J5.2 J6.2 J7.2 R3.1 SDA.1 STM1.62 | length 3536.9
  Top Layer w6: v1(2899.17,3005.42) 2899.17,3063.02 2898.39,3063.8 2899.17,3064.57 STM1.62 STM1.62@2899.17,3066.13
  Top Layer w10: v1(2195,4150) 2230,4115 J2.2 J3.2 J4.2 J5.2 J6.2 J7.2 ; SDA.1 2771.37,3493.52 3001.5,3263.39 R3.1 3000,3233.5 v1(3000,3185)
  Bottom Layer w10: v1(2195,4150) 2505,3840 2700,3840 2771.37,3768.63 SDA.1 2771.37,3760 SDA.1@2771.3,3760.06 ; v1(2899.17,3005.42) 2899.17,3084.17 v1(3000,3185)
NetMOTOR_V_1: MOTOR_V.1 STM1.16 U3.1 U3.4 | length 808.5
  Top Layer w6: MOTOR_V.1 2431.57,2375 2436.77,2375 2751.14,2689.37 STM1.16
  Top Layer w10: MOTOR_V.1@2431.57,2375 2434.17,2372.4 2534.17,2272.4 U3.1 2590,2272.4 2604.64,2257.77 2604.64,2211.74 2618.78,2197.6 U3.4
NetONBOARD_TEMP_V_1: STM1.20 TEMP_V.1 U4.1 U4.4 | length 1319.9
  Top Layer w6: STM1.20@2918.85,2609.44 STM1.20 2918.07,2655.37 v1(2986.21,2723.5) ; TEMP_V.1@3520,2355 TEMP_V.1
  Top Layer w10: TEMP_V.1 3595,2375 3625,2345 U4.1 3666.34,2262.4 3686.62,2242.12 3686.62,2200 3699.02,2187.6 U4.4
  Bottom Layer w10: v1(2986.21,2723.5) 3222.11,2723.5 3270,2675.62 3270,2495 3390,2375 TEMP_V.1
NetR6_1: R6.1 STM1.8 | length 896.7
  Top Layer w6: STM1.8 2778.36,2846.8 2877.77,2846.8 v1(2877.82,2846.75)
  Top Layer w10: R6.1 2153.84,2887.37 2150,2891.21 v1(2154.39,2895.61)
  Bottom Layer w6: v1@2877.38,2846.31 v1(2877.82,2846.75)
  Bottom Layer w10: v1(2154.39,2895.61) 2209.39,2895.61 2258.69,2846.31 v1@2877.38,2846.31
NetR7_2: R7.2 S2.1 STM1.26 | length 1224.8
  Top Layer w6: v1(3015.31,2680.46) 3036.18,2659.59 STM1.26
  Top Layer w10: 3570,1920 R7.2 S2.1
  Bottom Layer w10: v1(3015.31,2680.46) 3015.31,2461.5 3556.82,1920 v1(3556.89,1920)
NetR8_1: R8.1 STM1.9 | length 868
  Top Layer w6: STM1.9 2805.75,2827.17 2806.58,2828 2861.21,2828 2880.46,2808.75 v1(2884.8,2808.75)
  Top Layer w10: R8.1 2195,2807.02 v1(2195,2810)
  Bottom Layer w10: v1(2195,2810) 2197,2812 2881.55,2812 v1(2884.8,2808.75)
NetR9_1: R9.1 S3.1 STM1.27 | length 1562
  Top Layer w6: STM1.27 3055.87,2652.04 v1(3084.29,2680.46)
  Top Layer w10: S3.1@3880.57,1806.61 S3.1 R9.1 3880.63,1921.97 3882.6,1920 v1(3947.3,1920)
  Bottom Layer w10: v1(3084.29,2680.46) 3084.29,2482.45 3646.74,1920 v1(3947.3,1920)
NetR10_1: R10.1 STM1.10 | length 919.8
  Top Layer w6: STM1.10 2847.88,2807.48 2885,2770.36 v1(2885,2770)
  Top Layer w10: R10.1 2193.76,2650 v1(2200,2650)
  Bottom Layer w10: v1(2200,2650) 2575,2650 2695,2770 v1(2885,2770)
NetR11_1: R11.1 STM1.11 | length 974.1
  Top Layer w6: STM1.11 2820.51,2787.8 v1(2884.8,2723.5)
  Top Layer w10: R11.1 2155,2614.71 v1(2155,2570)
  Bottom Layer w6: v1@2883.3,2725 v1(2884.8,2723.5)
  Bottom Layer w10: v1(2155,2570) 2525,2570 2680,2725 v1@2883.3,2725
NetR19_2: R19.2 STM1.60 | length 70.6
  Top Layer w6: STM1.60 2937.76,3132.76 R19.2
NetSTM1_33: STM1.33 U2.4 | length 359.3
  Top Layer w6: STM1.33@3234.22,2690.15 STM1.33 3340.63,2689.37 3357.15,2672.85 3357.15,2587.85 3385,2560 3414.43,2560 U2.4
  Top Layer w10: U2.4@3414.43,2560 3419.94,2565.51 U2.4@3451.42,2565.51
NetSTM1_34: STM1.34 U2.1 | length 220.4
  Top Layer w6: STM1.34 3449.57,2709.06 U2.1 ; U2.1@3448.21,2712.3 U2.1@3451.42,2715.51
NetSTM1_44: STM1.44 U1.4 | length 394.2
  Top Layer w6: STM1.44 3441.22,2905.91 3471.58,2936.27 3471.58,3073.62 U1.4@3468.86,3076.34 ; U1.4 U1.4@3468.86,3077.76
NetSTM1_45: STM1.45 U1.1 | length 855.7
  Top Layer w6: v1(3166.3,2892.54) 3199.35,2925.59 STM1.45 ; v1(3405,3257.57) 3405,3256.27 3437.36,3223.91 U1.1
  Bottom Layer w6: v1(3166.3,2892.54) 3443.07,2892.54 3485,2934.47 3485,3180 v1@3405,3260
pads on no net: ?.0 CAN1_1.4 CAN1_1.5 CAN1_2.4 CAN1_2.5 CAN2_1.4 CAN2_1.5 CAN2_2.4 CAN2_2.5 J1.3 J1.4 J2.5 J2.6 J3.5 J3.6 J4.5 J4.6 J5.5 J5.6 J6.5 J6.6 J7.5 J7.6 J8.3 J8.4 J9.3 J9.4 S1.2 S1.3 STM1.2 STM1.3 STM1.4 STM1.14 STM1.21 STM1.22 STM1.23 STM1.24 STM1.25 STM1.28 STM1.29 STM1.35 STM1.36 STM1.37 STM1.38 STM1.39 STM1.40 STM1.41 STM1.42 STM1.43 STM1.53 STM1.54 STM1.55 STM1.56 STM1.57 STM1.58 STM1.59 U1.5 U2.5 Y1.4

## Polygon pours and split planes (outlines as drawn)
GND on Bottom Layer "Bottom Layer-GND" (solid, pour order 20): 1765,4535 1770,4530 1770,4080 1771.28,4080 1770.89,3290 1770,3290 1770,1515 1780,1515 1815,1480 1820,1485 4675,1485 4675,4505 4635,4545 4625,4535
GND on Bottom Layer "Bottom Layer-GND 1" (solid, pour order 24): 2017.76,3942.36
GND on Bottom Layer "Bottom Layer-GND 2" (solid, pour order 22): 1745,3635
+3V3 on Top Layer "Top Layer-+3V3" (solid, pour order 36): 1685.15,4510.15 1723.97,4471.32 1723.97,1451.32 4720,1451.32 4720,4620 1795,4620
no net on Top Layer "Top Layer-No Net" (solid, pour order 38): 5160,4415
+3V3 on Top Layer "Top Layer-+3V3 1" (solid, pour order 32): 2025,3945

## Other copper
Top Layer:
  pour cut-out: 2095,4020
Bottom Layer:
  pour cut-out: 1895,3727.62

## Silkscreen, mask and mechanical layers (free items; w line width, h text height)
Top Overlay:
  text "CURRENT SENSORS" at 2220,4455 h40
  text "3V3 STATUS" at 1895,3975 h40
  text "CAN CONNECTORS" at 4105,3780 h40
  text "RST" at 2620,3370 h40
  text "5V IN" at 2055,3300 h40
  text "12V MOTOR" at 2670,1665 h40
  text "24V BATTERY" at 3220,1665 h40
  text "UW-MARS-ROVER-SAFETY-REV1 / JAN 2020 / QINYANG BAO & NICOLE ROSARIO" at 3835,1600 h40
Mechanical 1:
  circle w0.5: c2017.76,1896.65 r59.06
  circle w0.5: c4379.96,4258.86 r59.06
  circle w0.5: c2017.76,4258.86 r59.06
  circle w0.5: c4379.96,1896.65 r59.06
Mechanical 3 [Outline]:
  lines w1: 1770,1545 ccw(c1820,1545) 1820,1495 ; 1770,1545 ccw(c1820,1545) 1820,1495 ; 1770,1545 1770,4475 ; 1770,1545 1770,4475 ; 1770,4475 cw(c1820,4475) 1820,4525 ; 1770,4475 cw(c1820,4475) 1820,4525 ; 1820,1495 4600,1495 ; 1820,1495 4600,1495 ; 1820,4525 4600,4525 ; 1820,4525 4600,4525 ; 4600,1495 ccw(c4600,1545) 4650,1545 ; 4600,1495 ccw(c4600,1545) 4650,1545 ; 4600,4525 cw(c4600,4475) 4650,4475 ; 4600,4525 cw(c4600,4475) 4650,4475 ; 4650,1545 4650,4475 ; 4650,1545 4650,4475

## Text inside footprints (layer, text, board x,y; h text height)
DEBUG: Top Overlay "TX" at 3040.24,3340.91 h40 r90; Top Overlay "RX" at 3142.6,3340.91 h40 r90; Top Overlay "RTS" at 3248.9,3312.28 h40 r90; Top Overlay "IO" at 3040.24,3640.04 h40 r90; Top Overlay "CLK" at 3142.6,3636.1 h40 r90; Top Overlay "RST" at 3241.81,3640.04 h40 r90; Top Overlay "VCC" at 2940,3325 h40 r90; Top Overlay "GND" at 2941.81,3640.04 h40 r90